# Altium PCB PCB1.PcbDoc (part 2 of 3)
Units mm, origin at the board's own origin, x right, y up, seen from the top; angles counter-clockwise.
Board outline 65.15 x 55.25 mm, 4 copper layers (Top Layer, Int1 (GND), Int2 (PWR), Bottom Layer), stack 1.369 mm thick; 135 components, 113 nets, 463 pads, 324 vias.
Unrouted connection lines stored in the file: 1.
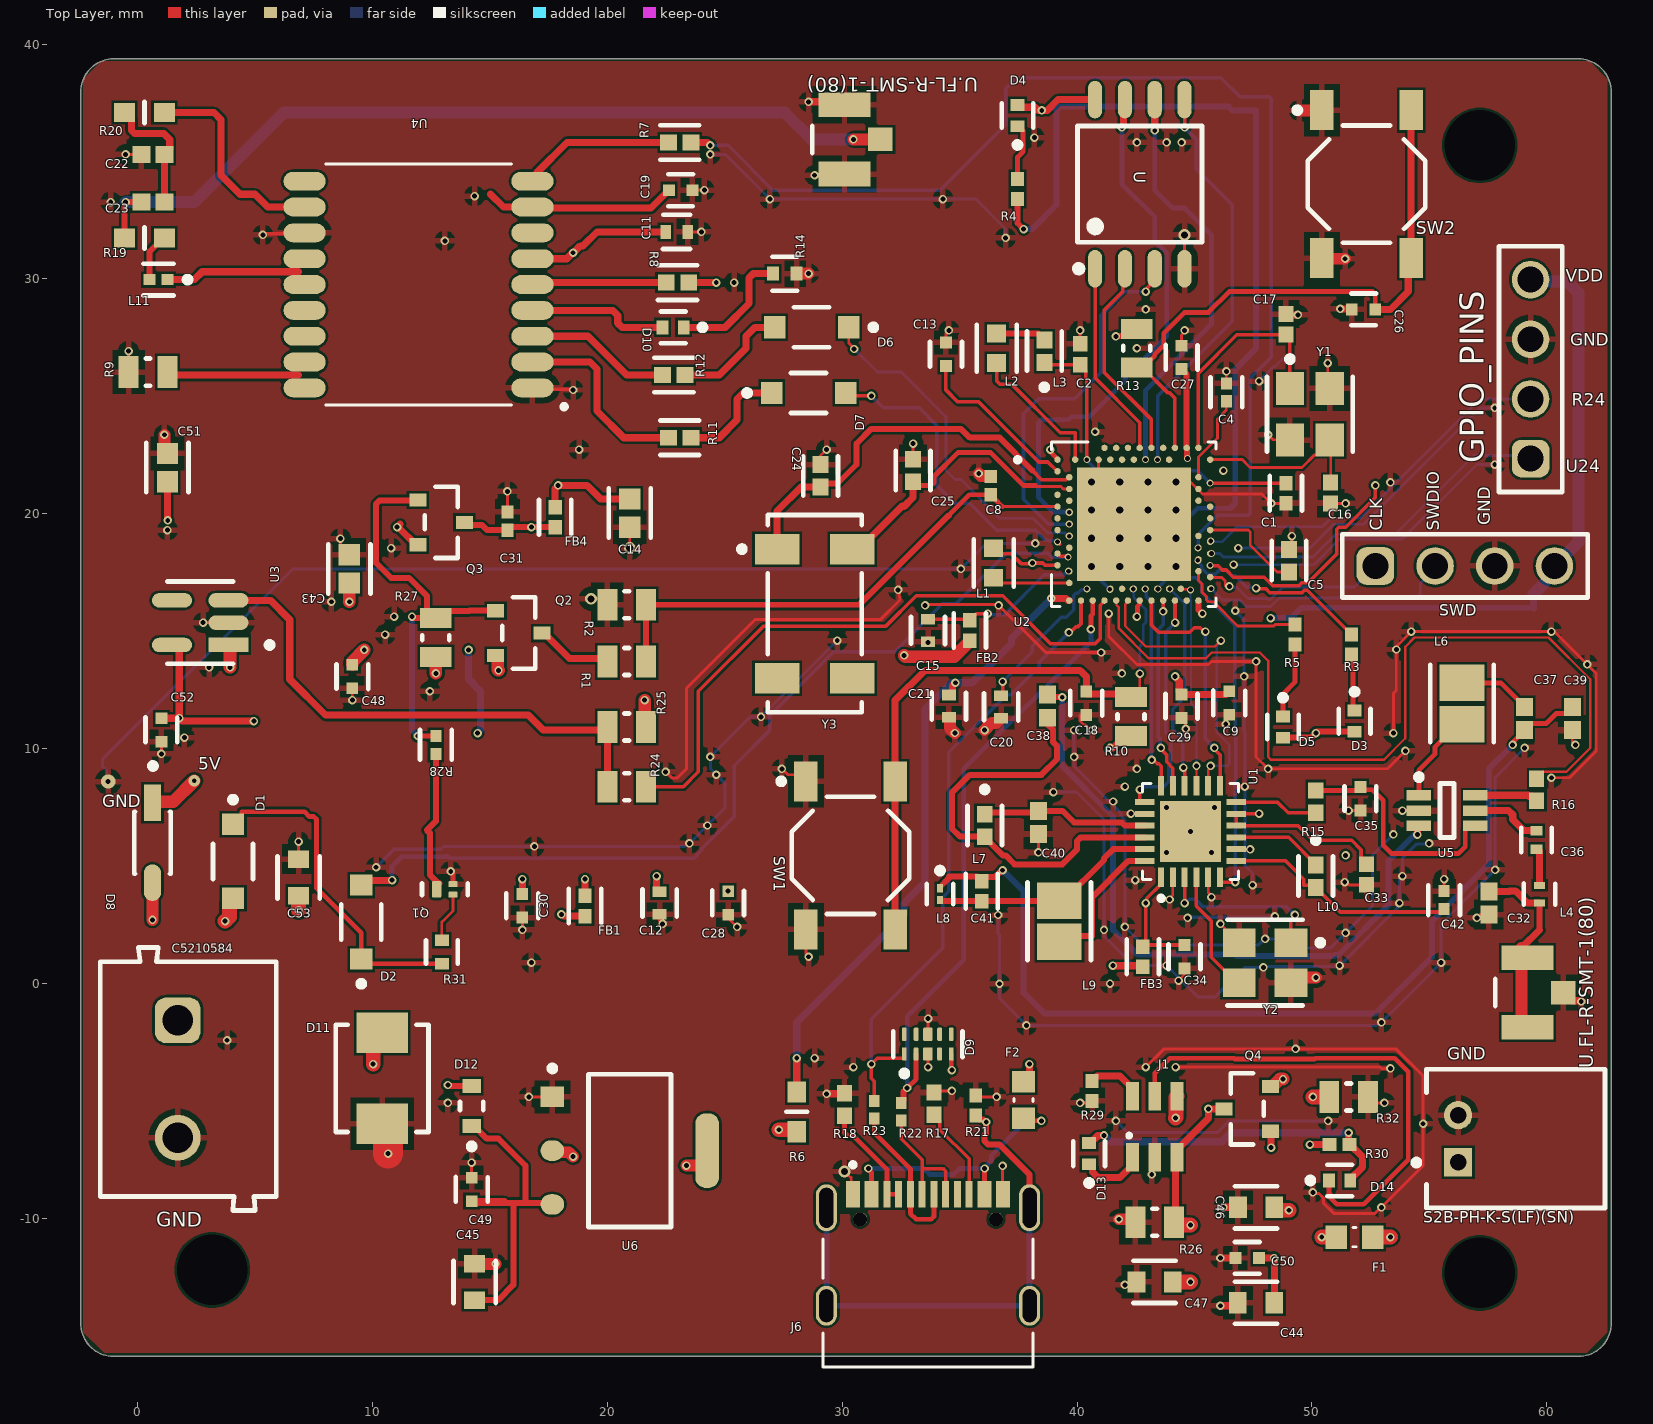
[diagram p0: Top Layer view]

## Part data (continued)
R28: library part CMP-2002-01782-2, "RES 1kΩ ±5% 0.063W 0402", Case Code (Imperial)=0402, Case Code (Metric)=1005, Max Operating Temperature=155°C, Max Power Dissipation=63mW, Min Operating Temperature=-55°C, Power Rating=62.5mW, Resistance=1kR, Resistor Type="Thick Film", Temperature Coefficient=100ppm/°C, Tolerance=5%, Voltage Rating=50V, Case/Package=0402, Features="Moisture Resistant", Height=0.015inch, Lead Free="Lead Free", Length=0.039inch, Number of Terminations=2, Packaging="Tape and Reel", RoHS Compliant=Yes, Series=AC, Termination=SMD/SMT, Weight=2.3E-05oz, Width=0.5mm
R30: library part CMP-2002-07985-1, Manufacturer="Yageo / Phycomp", Part Number=RC0402JR-07330RL
R31: library part CMP-2002-01790-3, "RES 10kΩ ±1% 0.063W 0402", Case Code (Imperial)=0402, Case Code (Metric)=1005, Max Operating Temperature=155°C, Max Power Dissipation=63mW, Min Operating Temperature=-55°C, Power Rating=62.5mW, Resistance=10kR, Resistor Type="Thick Film", Temperature Coefficient=100ppm/°C, Tolerance=1%, Voltage Rating=50V, Case/Package=0402, Construction=Rectangular, Depth=0.5mm, Features="Moisture Resistant", Height=0.015inch, Lead Free="Lead Free", Length=0.039inch, Military Standard=Not, Number of Terminations=2, Packaging="Tape and Reel", RoHS Compliant=Yes, Series=AC, Size Code=0402, Termination=SMD/SMT, Width=0.02inch
S2B-PH-K-S(LF)(SN): library part CMP-1755-00004-1, "Male Header, Pitch 2 mm, 1 x 2 Position, Height 4.8 mm, Tail Length 3.4 mm, -25 to 85 degC, RoHS, Bulk", Capacitance="10 uF", Case\Package=Radial, Max Operating Temperature="85 degC", Min Operating Temperature="-40 degC", Package Quantity=200, Tolerance=20%, Voltage Rating="50 V", ComponentLink1Description=Datasheet, ComponentLink1URL=http://www.jst-mfg.com/product/pdf/eng/ePH.pdf, DatasheetVersion=Dec-12, Diameter="5 mm", Height="11 mm", Lead Pitch="2 mm", Length="11 mm", Mount="Through Hole", PackageDescription="Male Header, Pitch 2 mm, 1 x 2 Position, Height 4.8 mm, Tail Length 3.4 mm", PackageReference=S2B-PH-K-S, Packaging=Bulk, Pins=2, Radiation Hardening=No, REACH SVHC="No SVHC", RoHSCompliant=true, Voltage Rating (DC)="50 V"
SW1 SW2: library part CMP-1696-00003-1, "Switch, Tactile, SPST-NO, 50 mA, 12 V, 4-Pin SMD, RoHS, Tape and Reel", Capacitance="4.7 uF", Case\Package=Radial, Max Operating Temperature="85 degC", Min Operating Temperature="-40 degC", Package Quantity=200, Tolerance=20%, Voltage Rating="50 V", ComponentLink1Description="Manufacturer URL", ComponentLink1URL=http://www.e-switch.ch/en/, ComponentLink2Description=Datasheet, ComponentLink2URL=http://spec_sheets.e-switch.com/specs/P010632.pdf, DatasheetVersion="Rev. I, 12/2010", Diameter="5 mm", Height="11 mm", Lead Pitch="2 mm", Length="11 mm", Mount="Through Hole", PackageDescription="4-Pin Surface Mount Device, Body 5 x 5 mm, Pitch 6.3 mm", PackageReference=TL3342F160QG, Packaging=Bulk, Pins=2, Radiation Hardening=No, REACH SVHC="No SVHC", RoHSCompliant=true, Voltage Rating (DC)="50 V", Width="0 inch"
U: "FLASH - NOR Memory IC 32Mb _4M x 8_ SPI - Quad I/O 133MHz 8-SOIC", Availability=Unavailable, MF=Winbond, MP=W25Q32JVSSIQ, Price=None, SnapEDA_Link=https://www.snapeda.com/parts/W25Q32JVSSIQ/Winbond%20Electronics/view-part/596953/?ref=snap
U1: "IC RF TxRx Only General ISM < 1GHz LoRaWAN 150MHz ~ 960MHz 24-VFQFN Exposed Pad", Package="VFQFN-24 Semtech", Availability=Unavailable, MF="Semtech Corporation", MP=SX1262IMLTRT, Price=None, SnapEDA_Link=https://www.snapeda.com/parts/SX1262IMLTRT/Semtech%20Corporation/view-part/2781045/?ref=snap
U2: "IC RF TxRx + MCU 802.15.4, Bluetooth Bluetooth v5.0, Thread, ZigbeeÂ® 2.4GHz 73-VFQFN Dual Rows, Exposed Pad", Package="VFQFN-73 Nordic", Availability="In Stock", Check_prices=https://www.snapeda.com/parts/NRF52840-QIAA-R/Nordic+Semiconductor+ASA/view-part/?ref=eda, MF=Nordic, MP=NRF52840-QIAA-R, Price=None, Purchase-URL=https://pricing.snapeda.com/search?q=NRF52840-QIAA-R&ref=eda, SnapEDA_Link=https://www.snapeda.com/parts/NRF52840-QIAA-R/Nordic+Semiconductor+ASA/view-part/?ref=snap
U3: library part CMP-12756-000035-1, "IC REG LINEAR 3.3V 600MA SOT25", Case/Package=SOT-23-5, Dropout Voltage=250mV, Max Input Voltage=6V, Max Operating Temperature=85°C, Max Output Current=600mA, Min Input Voltage=2.5V, Min Operating Temperature=-40°C, Output Voltage=3.3V, Package Quantity=1, Quiescent Current=55uA, Accuracy=1.5%, Height=1.3mm, Lead Free="Lead Free", Length=3.1mm, Mount="Surface Mount", Number of Outputs=1, Number of Pins=5, Number of Regulators=1, Output Current=600mA, Output Type=Fixed, Packaging="Tape and Reel", Polarity=Positive, Width=1.7mm
U4: library part L76, "L76, the extremely compact GNSS module, is a concurrent GNSS receiver with multiple GNSS systems. It provides simultaneous GPS, GLONASS, BeiDou, Galileo and QZSS open service L1 reception capability.", Package="Custom Quectel", Availability="In Stock", Check_prices=https://www.snapeda.com/parts/L76/Quectel/view-part/?ref=eda, MF=Quectel, MP=L76, Price=None, Purchase-URL=https://pricing.snapeda.com/search/part/L76/?ref=eda, SnapEDA_Link=https://www.snapeda.com/parts/L76/Quectel/view-part/?ref=snap
U5: library part CMP-2000-05298-1, "IC RF Switch SPDT, 50 Ohm, 6-Pin SC70, RoHS, Tape and Reel", Frequency - Lower=10MHz, Frequency - Upper=3GHz, Insertion Loss @ Frequency=0.5dB@2GHz, Isolation @ Frequency=20dB@2GHz(typ), Manufacturer="Peregrine Semiconductor", Operating Temperature=-40degC~85degC, Package / Case=6-TSSOP,SC-88,SOT-363, Package Description="6-Pin Small Outline Transistor, Body 2.05 x 1.25 mm, Pitch 0.65 mm", Package Reference=SC-70-6, Standard Package=3,000, Voltage - Supply=1.8V~3.3V, Category=RF/IFandRFID, Circuit=SPDT, Datasheet URL=https://datasheet.ciiva.com/15100/getdatasheetpartid-685660-15100501.pdf, Datasheet Version=Jan-11, Family=RFSwitches, Features=Single/DualLineControl, IIP3=55dBm(typ), Impedance=50Ohm, Manufacturer URL=http://www.psemi.com/, Online Catalog=PE4259, Other Names=1046-1011-24259-63-ND425963PE4259PE4259SCBC-ZPE4259SCBC-Z-ND, P1dB=29dBm(typ)IP1dB, Packaging=Tape&Reel(TR), RF Type=GeneralPurpose, Series=UltraCMOS, Supplier Device Package=SC-70-6, Topology=Reflective
U6: library part CMP-209535-000001-1, "LDO Voltage Regulators 1A, 3.3V", Dropout Voltage=1.1V, Manufacturer="Advanced Monolithic Systems", Manufacturer Part Number=AMS1117-3.3, Max Junction Temp=+125°C, Max Power Dissipation=1.2W, Max Supply Voltage=15V, Nominal Supply Current=5mA, Output Current=1A, Output Voltage=3.3V, Package=AMS1117, Temperature="-40°C to +125°C", Temperature Range Low=-40°C, Automotive=No, Category=IC, ComponentLink2Description=Datasheet, ComponentLink2URL=http://www.advanced-monolithic.com/pdf/ds1117.pdf, Device Class L1="Integrated Circuits (ICs)", Device Class L2="Power Management ICs", Device Class L3="Voltage Regulators - Linear", Height=1.8mm, Ipc Land Pattern Name=SOT229P700X180-4, Lead Free=Yes, Number of Outputs=1, Octopart=https://octopart.com/ams1117-3.3-advanced+monolithic+systems-25899300, Output Type=Fixed, RoHS=TRUE, Standoff Height=0.64mm, Temperature Range High=+125°C
U.FL-R-SMT-1(80): library part CMP-2000-05152-3, "CONN U.FL RCPT STR 50 OHM SMD", Dielectric Material=Polymer, Frequency=6GHz, Housing Color=Beige, Insulation Resistance=500MR, Max Operating Temperature=90°C, Min Operating Temperature=-40°C, Package Quantity=2500, Body Material=Bronze, Body Plating=Silver, Connector Type=Coaxial, Contact Material=Brass, Contact Plating=Gold, Depth=3.1mm, Fastening Type=Snap, Gender=Male, Impedance=50R, Lead Free="Lead Free", Length=3mm, Max Frequency=6GHz, Mount="Surface Mount", Orientation=Straight, Packaging="Cut Tape", Radiation Hardening=No, REACH SVHC="No SVHC", Series=U.FL, Termination=Solder, Weight=0.001764oz, Wire/Cable Type=Coaxial
U.FL-R-SMT-1(80): library part CMP-2000-05152-3, "CONN U.FL RCPT STR 50 OHM SMD Brass 1 Inner needle IPEX Board Edge 1.25mm -40℃~+90℃ 6GHz 50Ω 2mm SMD  RF Connectors / Coaxial Connectors ROHS", Dielectric Material=Polymer, Frequency=6GHz, Housing Color=Beige, Insulation Resistance=500MR, Max Operating Temperature=90°C, Min Operating Temperature=-40°C, Package Quantity=2500, Body Material=Bronze, Body Plating=Silver, Connector Type=Coaxial, Contact Material=Brass, Contact Plating=Gold, Depth=3.1mm, Fastening Type=Snap, Gender=Male, Impedance=50R, Lead Free="Lead Free", Length=3mm, Max Frequency=6GHz, Mount="Surface Mount", Orientation=Straight, Packaging="Cut Tape", Radiation Hardening=No, REACH SVHC="No SVHC", Series=U.FL, Termination=Solder, Weight=0.001764oz, Wire/Cable Type=Coaxial
Y1 Y2: library part CMP-27762-014975-1, "Crystal 32MHz ±30ppm (Tol) ±30ppm (Stability) 12pF FUND 50Ω 4-Pin SMD T/R", Case/Package=CSMD, ESR (Equivalent Series Resistance)=50R, Frequency=32MHz, Frequency Stability=30ppm, Load Capacitance=10pF, Max Operating Temperature=70°C, Min Operating Temperature=-20°C, Package Quantity=1000, Depth=2.5mm, Frequency Tolerance=30ppm, Height=1mm, Lead Free="Lead Free", Length=3.2mm, Mount="Surface Mount", Number of Pins=4, Packaging="Tape and Reel", Series=ABM8G, Series Resistance=50R, Termination=SMD/SMT, Tolerance=30ppm, Width=2.5mm
Y3: library part CMP-2000-05037-2, "CRYSTAL 32.7680KHZ 12.5PF SMD", Case/Package=SMD/SMT, ESR (Equivalent Series Resistance)=50kR, Frequency=32.768kHz, Frequency Tolerance=20ppm, Load Capacitance=12.5pF, Max Operating Temperature=85°C, Min Operating Temperature=-40°C, Operating Frequency="32.768 kHz", Package Quantity=1000, Depth=3.8mm, Height=0.098inch, Lead Free="Lead Free", Length=8mm, Mount="Surface Mount", Number of Pins=4, Packaging="Tape and Reel", Radiation Hardening=No, REACH SVHC="No SVHC", RoHS Compliant=Yes, Series=ABS25, Series Resistance=50kR, Termination=SMD/SMT, Tolerance=20ppm, Width=3.8mm

## Free pads (board coordinates)
  round 1.2 hole 3 unplated: 3(57.15,-12.319)
  round 1.524 hole 3 unplated: 4(3.175,-12.192) 5(57.15,35.687)

## Via types
v1: diameter 0.36, hole 0.21, Top Layer to Bottom Layer, 294 vias
v2: diameter 0.3, hole 0.2, Top Layer to Bottom Layer, 24 vias
v3: diameter 0.5, hole 0.3, Top Layer to Bottom Layer, 4 vias
v4: diameter 0.6, hole 0.21, Top Layer to Bottom Layer, 1 vias
v5: diameter 0.5, hole 0.21, Top Layer to Bottom Layer, 1 vias

## Nets (pads, with @x,y where several pads share a name; then routed paths per layer and width w, separated by ;. In a path a pad name is that pad's centre, name@x,y a point inside that pad or via, vN(x,y) a via of type N, cw(c..) or ccw(c..) an arc to the next point about the centre after c; other vN are vias at no path point)
5V: C43.2 C48.2 D8.1 FB2.2 Q2.2 Q4.2 R25.2 R27.2 U3.1 | length 104.5
  Top Layer w0.54: D8.1@0.635,7.696 0.685,7.696 0.736,7.747 1.524,7.747 v5(2.413,8.636) ; U3.1@3.868,14.417 3.899,14.417 3.937,14.379 v1(3.937,13.462) ; v1(9.017,16.256) C43.2@9.017,17.052 ; C48.2@9.144,13.573 9.144,13.704 v1(9.652,14.212) ; v1(12.7,13.208) R27.2@12.7,13.907 ; Q2.2@15.24,13.97 15.329,13.97 15.338,13.961 15.338,13.364 v1(15.367,13.335) ; v1(21.59,12.065) 21.59,10.985 R25.2@21.653,10.922 ; v1(32.639,13.97) 32.695,13.914 34.763,13.914 35.417,14.567 35.417,14.589 FB2.2@35.433,14.605 ; Q4.2@48.235,-4.381 48.324,-4.381 48.641,-4.064 v1(48.768,-4.064)
  Int2 (PWR) w0.54: 1.702,7.747 1.524,7.569 1.524,6.731 3.429,4.826 8.382,4.826 11.557,1.651 17.018,1.651 19.558,-0.889 43.18,-0.889 45.339,-3.048 48.768,-3.048 v1(48.768,-4.064) ; 1.778,8.001 3.937,10.16 v1(3.937,13.462) 5.715,13.462 7.493,15.24 9.001,15.24 ; v1(9.017,16.256) 9.017,16.235 9.001,16.219 9.001,15.24 ; v1(9.652,14.212) 9.326,14.537 9.326,14.914 9.001,15.24 ; 9.652,14.478 10.525,13.605 12.303,13.605 v1(12.7,13.208) 15.24,13.208 v1(15.367,13.335) 16.637,12.065 v1(21.59,12.065) 22.098,11.557 27.813,11.557 30.391,14.135 32.474,14.135 v1(32.639,13.97)
12V: C5210584.1 D11.2 D12.2 | length 16
  Top Layer w0.254: v1(13.208,-4.318) 13.247,-4.357 D12.2@14.224,-4.357
  Top Layer w0.635: v1(10.033,-3.429) 10.033,-2.475 D11.2@10.414,-2.094
  Int2 (PWR) w0.635: C5210584.1@1.13,-1.564 5.882,-1.564 7.747,-3.429 v1(10.033,-3.429) 10.287,-3.175 12.065,-3.175 v1(13.208,-4.318)
BAT: Q2.3 R1.2 | length 3.3
  Top Layer w0.305: Q2.3@17.221,14.922 17.31,14.922 18.39,13.843 19.876,13.843 R1.2@20.003,13.716

## Text inside footprints (layer, text, board x,y; h text height)
J6: Top 3D Body "PCB EDGE" at 38.855,-15.616 h0.51